# EAGLE board single_board_voice_changer (EAGLE 7.1.0)
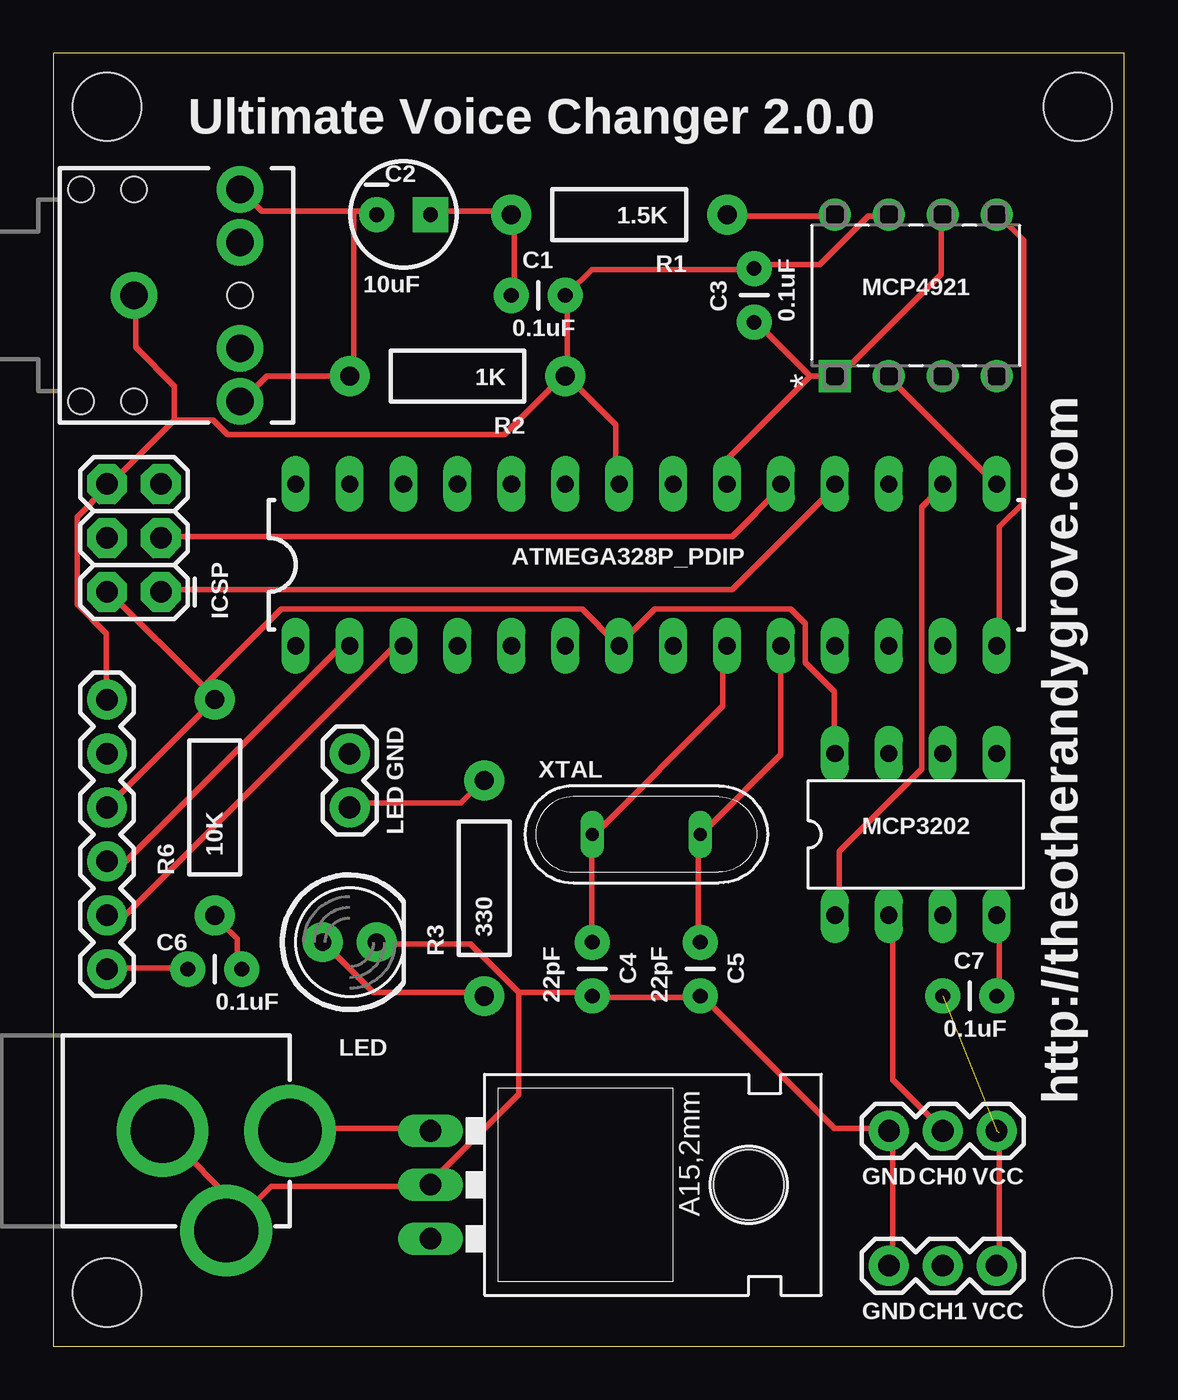
[diagram p0: board, top side]
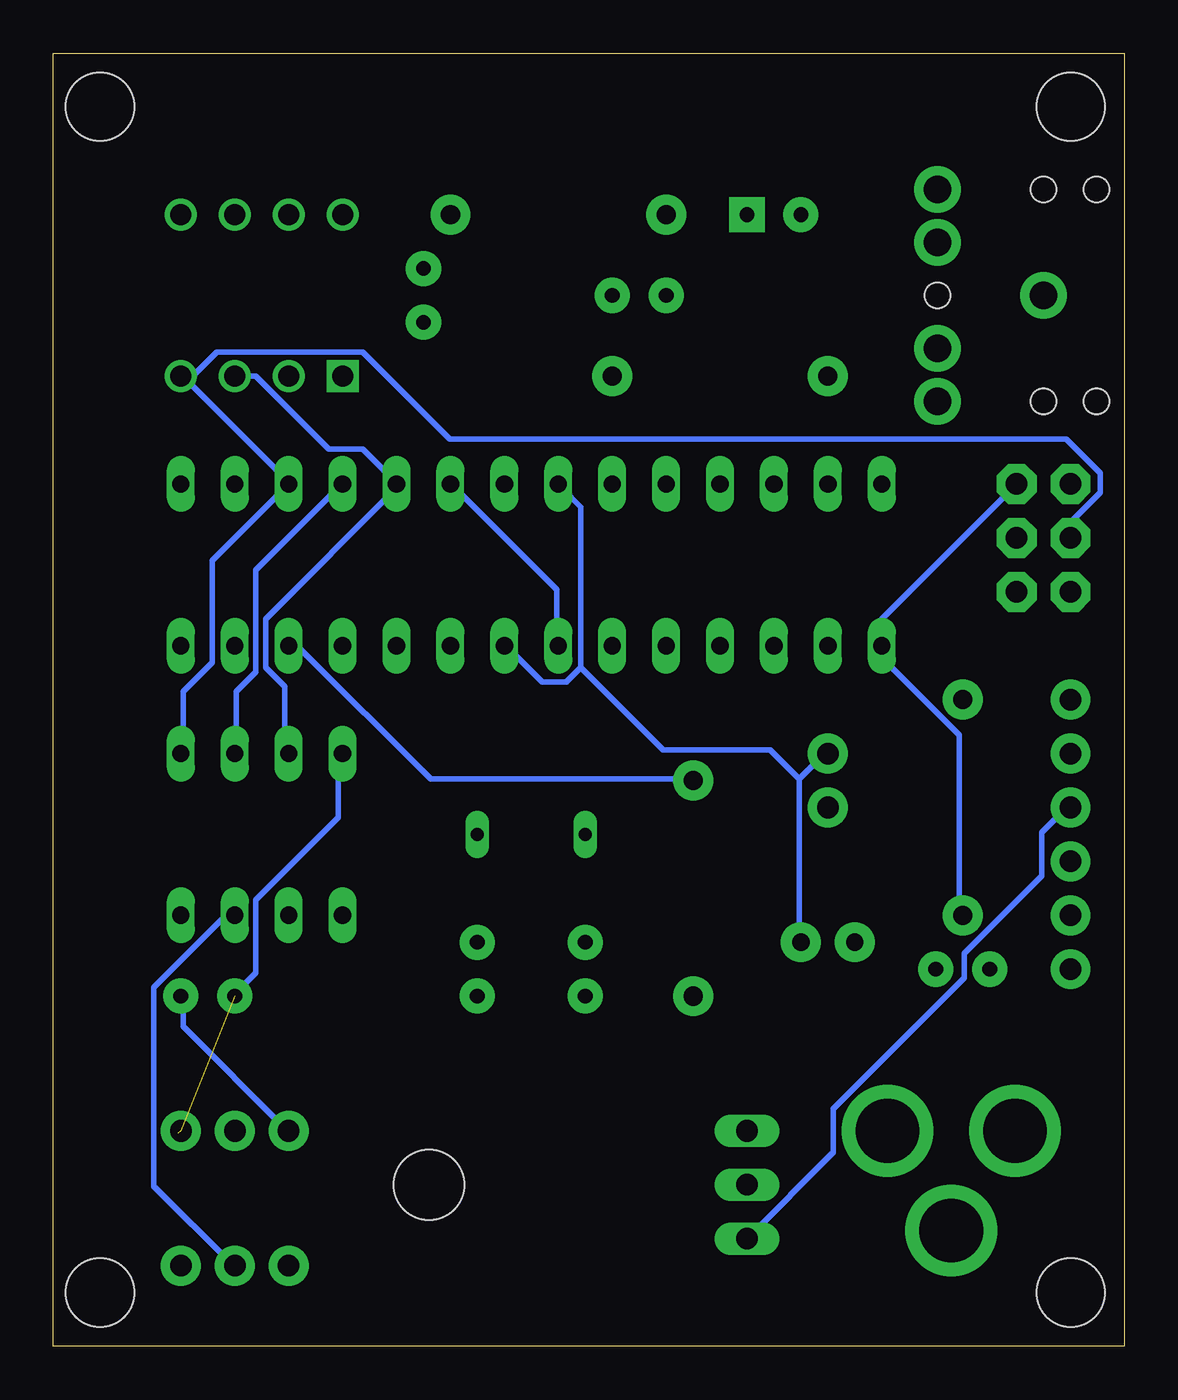
[diagram p1: board, bottom side, seen from below]

Size 50.47 x 60.95 mm. Coordinates in mm from the lower left corner, seen from the top.
Outline: 0,0 50.47,0 50.47,60.95 0,60.95 0,0
Copper layers (1*16): Top 0.035mm / dielectric 1.5mm / Bottom 0.035mm
Design rules "default": minimum track width 10mil, minimum drill 24mil, track to track 8mil, track to pad 8mil, pad to pad 8mil, via to via 8mil, smd to smd 8mil, copper to edge 40mil, drill to drill 8mil, minimum pad ring 10mil, minimum via ring 8mil, stop-mask expansion 4mil, vias tented up to drill 0mil, thermal gap 10mil
Holes 3.2 mm at 2.54,2.54 2.54,58.42 48.26,58.42 48.26,2.54

## Footprints (pad centres in the part's own frame; a part is rotated, then mirrored left to right if it is on the bottom)
AUDIO-JACK = drill 1.3 pad 2.184: RING 5,5; RSH 5,2.5; SLEEVE 0,0; TIP 5,-5; TSH 5,-2.5 | hole 1.2: 0,5; -2.5,5; -2.5,-5; 0,-5; 5,0
CAP-PTH-SMALL = drill 0.7 pad 1.651: 1 0,0; 2 2.54,0
CPOL-RADIAL-10UF-25V = drill 0.7 pad 1.651 square: 1 1.27,0 | drill 0.7 pad 1.651: 2 -1.27,0
1X02 = drill 1.016 pad 1.88: 1 0,0; 2 2.54,0
78XXL = drill 1.016 long: GND 0,-3.81; IN -2.54,-3.81; OUT 2.54,-3.81 | hole 3.302: 0,11.176
DIL8 = drill 0.813 long: 1 -3.81,-3.81; 2 -1.27,-3.81; 3 1.27,-3.81; 4 3.81,-3.81; 5 3.81,3.81; 6 1.27,3.81; 7 -1.27,3.81; 8 -3.81,3.81
2X3 = drill 1.016 pad 1.88 octagon: 1 0,0; 2 0,2.54; 3 2.54,0; 4 2.54,2.54; 5 5.08,0; 6 5.08,2.54
1X03 = drill 1.016 pad 1.88: 1 0,0; 2 2.54,0; 3 5.08,0
POWER_JACK_PTH = drill 2.997 pad 4.318: GND 0,7.7; GNDBREAK 4.7,10.7; PWR 0,13.7
1X06 = drill 1.016 pad 1.88: 1 0,0; 2 2.54,0; 3 5.08,0; 4 7.62,0; 5 10.16,0; 6 12.7,0
LED5MM = drill 0.813 pad 1.88: A -1.27,0; K 1.27,0
AXIAL-0.4 = drill 0.9 pad 1.88: P$1 -5.08,0; P$2 5.08,0
DIL28-3 = drill 0.813 long: 1 -16.51,-3.81; 2 -13.97,-3.81; 3 -11.43,-3.81; 4 -8.89,-3.81; 5 -6.35,-3.81; 6 -3.81,-3.81; 7 -1.27,-3.81; 8 1.27,-3.81; 9 3.81,-3.81; 10 6.35,-3.81; 11 8.89,-3.81; 12 11.43,-3.81; 13 13.97,-3.81; 14 16.51,-3.81; 15 16.51,3.81; 16 13.97,3.81; 17 11.43,3.81; 18 8.89,3.81; 19 6.35,3.81; 20 3.81,3.81; 21 1.27,3.81; 22 -1.27,3.81; 23 -3.81,3.81; 24 -6.35,3.81; 25 -8.89,3.81; 26 -11.43,3.81; 27 -13.97,3.81; 28 -16.51,3.81
DIP254P762X432-8 = drill 0.991 square: 1 -7.62,7.62 | drill 0.991: 2 -7.62,5.08; 3 -7.62,2.54; 4 -7.62,0; 5 0,0; 6 0,2.54; 7 0,5.08; 8 0,7.62
QS = drill 0.61 long: 1 -2.54,0; 2 2.54,0

## Placement (x,y rotation side)
AUDIO_JACK  [AUDIO-JACK]  3.81,49.53 0 top
C1  0.1uF  [CAP-PTH-SMALL]  21.59,49.53 0 top
C2  10uF  [CPOL-RADIAL-10UF-25V]  16.51,53.34 0 top
C3  0.1uF  [CAP-PTH-SMALL]  33.02,48.26 90 top
C4  22pF  [CAP-PTH-SMALL]  25.4,19.05 270 top
C5  22pF  [CAP-PTH-SMALL]  30.48,19.05 270 top
C6  0.1uF  [CAP-PTH-SMALL]  6.35,17.78 0 top
C7  0.1uF  [CAP-PTH-SMALL]  41.91,16.51 0 top
EXT_LED  M02PTH  [1X02]  13.97,27.94 270 top
IC1  [78XXL]  21.59,7.62 270 top
IC2  MCP3202P  [DIL8]  40.64,24.13 0 top
ICSP  AVR_SPI_PRG_6PTH  [2X3]  5.08,35.56 90 top
INPUT1  [1X03]  39.37,10.16 0 top
INPUT2  [1X03]  39.37,3.81 0 top
JP1  POWER_JACKPTH  [POWER_JACK_PTH]  -2.54,10.16 270 top
JP2  [1X06]  2.54,17.78 90 top
LED  [LED5MM]  13.97,19.05 0 top
R1  1.5K  [AXIAL-0.4]  26.67,53.34 180 top
R2  1K  [AXIAL-0.4]  19.05,45.72 180 top
R3  330  [AXIAL-0.4]  20.32,21.59 90 top
R6  10K  [AXIAL-0.4]  7.62,25.4 90 top
U1  ATMEGA328P_PDIP  [DIL28-3]  27.94,36.83 0 top
U$1  MCP4921-E/P  [DIP254P762X432-8]  44.45,53.34 90 top
XTAL  [QS]  27.94,24.13 0 top

## Library data of the parts
AUDIO_JACK EXT_LED ICSP INPUT1 INPUT2 = SparkFun-Connectors
C1-C5 C7 R1-R3 R6 = SparkFun-Passives
C6 = SparkFun-Capacitors
IC1 = SparkFun-PowerIC
IC2 = microchip; MF: MICROCHIP; MPN: MCP3202-CI/P; OC_FARNELL: 1196794; OC_NEWARK: 72K7287
JP1 = SparkFun-Connectors; PROD_ID: CONN-08197
JP2 = SparkFun-Connectors; PROD_ID: CONN-08437
LED = SparkFun-LED
U1 = SparkFun-DigitalIC
U$1 = Microchip_By_element14_Batch_1; MPN: MCP4921-E/P; OC_FARNELL: 1332112; OC_NEWARK: 08J8743; PACKAGE: DIP-8; SUPPLIER: Microchip
XTAL = special

## Nets
ADC_CH0: IC2.2 INPUT1.2
ADC_CH1: IC2.3 INPUT2.2
CTS: JP2.5
DTR: C6.1 JP2.1
GND: AUDIO_JACK.SLEEVE C1.2 C3.2 C4.2 C5.2 C7.2 EXT_LED.1 IC1.GND IC2.4 ICSP.6 INPUT1.1 INPUT2.1 JP1.GND JP1.GNDBREAK JP2.6 LED.K R2.P$1 U1.8 U1.22 U$1.7
LDAC: U1.14 U$1.5
LED: EXT_LED.2 R3.P$2 U1.12
MISO: IC2.6 ICSP.1 U1.18
MOSI: IC2.5 ICSP.4 U1.17 U$1.4
N$1: R1.P$1 U$1.8
N$2: C1.1 C2.1 R1.P$2
N$3: LED.A R3.P$1
N$4: IC1.IN JP1.PWR
N$5: C4.1 U1.9 XTAL.1
N$8: C5.1 U1.10 XTAL.2
N$10: AUDIO_JACK.RING AUDIO_JACK.TIP C2.2 R2.P$2
RESET: C6.2 ICSP.5 R6.P$1 U1.1
RX: JP2.3 U1.2
SCK: IC2.7 ICSP.3 U1.19 U$1.3
SS_ADC: IC2.1 U1.16
SS_DAC: U1.15 U$1.2
TX: JP2.2 U1.3
VCC: C3.1 C7.1 IC1.OUT IC2.8 ICSP.2 INPUT1.3 INPUT2.3 JP2.4 R6.P$2 U1.7 U1.20 U$1.1 U$1.6

## Tracks (layer width: path | path; a pad name or v marks a point on that pad's centre or on a via)
ADC_CH0
  Top 0.254: IC2.2 39.55,20.12 39.55,12.57 41.83,10.29 INPUT1.2
ADC_CH1
  Bottom 0.254: IC2.3 42.06,20.12 42.52,20.12 45.72,16.92 45.72,7.54 42.06,3.89 INPUT2.2
DTR
  Top 0.254: C6.1 6.17,17.83 2.74,17.83 JP2.1
GND
  Top 0.254: JP2.6 2.52,30.63 2.52,33.6 1.14,34.98 1.14,39.09 2.52,40.46 ICSP.6 2.74,40.69 5.71,43.66 | 5.71,43.66 5.71,45.26 3.89,47.09 3.89,49.38 AUDIO_JACK.SLEEVE | U$1.7 39.32,53.26 38.41,53.26 36.12,50.98 33.15,50.98 C3.2 32.92,50.75 25.38,50.75 24.23,49.61 C1.2 24.23,49.38 24.23,45.72 | 24.23,45.72 26.52,43.43 26.52,40.69 U1.22 | 24.23,45.72 R2.P$1 24,45.72 21.26,42.98 8.23,42.98 7.54,43.66 5.71,43.66 | 9.14,6.4 8.23,5.49 JP1.GNDBREAK 9.14,6.4 | 9.14,6.4 10.29,7.54 17.6,7.54 IC1.GND 17.83,7.77 21.95,11.89 21.95,16.69 | 9.14,6.4 8.91,6.4 5.26,10.06 JP1.GND | IC2.4 44.58,20.12 44.58,16.69 C7.2 | INPUT2.1 39.55,3.89 39.55,10.06 INPUT1.1 39.32,10.29 36.8,10.29 30.63,16.46 C5.2 30.4,16.46 25.6,16.46 C4.2 25.38,16.69 21.95,16.69 | 21.95,16.69 19.66,18.97 15.32,18.97 LED.K
  Bottom 0.254: 25.6,32 26.29,31.32 27.43,31.32 29.03,32.92 U1.8 | 25.6,32 25.6,39.55 26.52,40.46 U1.22 | C7.2 44.35,16.46 44.35,15.09 39.55,10.29 INPUT1.1 | 15.32,26.75 15.32,19.2 LED.K | 15.32,26.75 14.17,27.89 EXT_LED.1 | 25.6,32 21.72,28.12 16.69,28.12 15.32,26.75
LDAC
  Top 0.254: U1.14 44.58,33.15 44.58,38.63 45.72,39.78 45.72,52.12 44.58,53.26 U$1.5
LED
  Top 0.254: EXT_LED.2 14.17,25.6 19.2,25.6 20.12,26.52 R3.P$2
  Bottom 0.254: U1.12 39.32,32.92 38.86,32.92 32.69,26.75 20.34,26.75 R3.P$2
MISO
  Top 0.254: ICSP.1 5.26,35.66 32,35.66 36.8,40.46 U1.18
  Bottom 0.254: IC2.6 41.83,28.12 41.83,30.86 40.92,31.77 40.92,36.58 37.03,40.46 U1.18
MOSI
  Bottom 0.254: IC2.5 44.35,28.12 44.35,30.86 42.98,32.23 42.98,37.03 U1.17 39.32,40.69 44.12,45.49 | 44.12,45.49 44.35,45.72 U$1.4 44.12,45.49 | 44.12,45.49 42.75,46.86 35.89,46.86 31.77,42.75 2.74,42.75 1.14,41.15 1.14,40.23 2.52,38.86 2.52,38.18 ICSP.4
N$1
  Top 0.254: U$1.8 36.8,53.26 31.77,53.26 R1.P$1
N$2
  Top 0.254: C2.1 17.83,53.49 21.49,53.49 R1.P$2 21.72,53.26 21.72,49.61 C1.1
N$3
  Top 0.254: R3.P$1 20.12,16.69 15.09,16.69 12.8,18.97 LED.A
N$4
  Top 0.254: IC1.IN 17.6,10.29 11.2,10.29 JP1.PWR
N$5
  Top 0.254: C4.1 25.38,19.2 25.38,24 XTAL.1 25.6,24.23 31.55,30.18 31.55,32.92 U1.9
N$8
  Top 0.254: C5.1 30.4,19.2 30.4,24 XTAL.2 30.63,24.23 34.29,27.89 U1.10
N$10
  Top 0.254: AUDIO_JACK.TIP 8.91,44.58 10.06,45.72 R2.P$2 14.17,45.72 14.17,53.49 | 14.17,53.49 9.83,53.49 8.91,54.41 AUDIO_JACK.RING | 14.17,53.49 15.09,53.49 C2.2
RESET
  Top 0.254: C6.2 8.69,17.83 8.69,19.2 7.77,20.12 R6.P$1
  Bottom 0.254: ICSP.5 11.43,34.29 U1.1 11.43,32.46 7.77,28.8 7.77,20.34 R6.P$1
RX
  Top 0.254: JP2.3 3.43,22.86 13.49,32.92 13.95,32.92 U1.2
SCK
  Top 0.254: ICSP.3 5.26,38.18 32,38.18 34.29,40.46 U1.19
  Bottom 0.254: IC2.7 39.55,28.12 39.55,31.09 40.46,32 40.46,34.29 34.29,40.46 U1.19 34.29,40.69 35.89,42.29 37.49,42.29 40.92,45.72 U$1.3
SS_ADC
  Top 0.254: IC2.1 37.03,20.34 37.03,23.32 40.92,27.2 40.92,39.55 41.83,40.46 U1.16
SS_DAC
  Top 0.254: U1.15 44.35,40.69 39.32,45.72 U$1.2
TX
  Top 0.254: U1.3 16.46,32.92 16,32.92 3.43,20.34 2.74,20.34 JP2.2
VCC  (2 unrouted)
  Top 0.254: 7.09,31.09 7.54,30.63 R6.P$2 | 7.09,31.09 2.74,35.43 ICSP.2 | JP2.4 R6.P$2 | 35.66,45.72 U$1.1 37.03,45.72 41.83,50.52 41.83,53.26 U$1.6 | 35.66,45.72 33.15,48.23 C3.1 | 35.66,45.72 31.77,41.83 31.77,40.69 U1.20 | IC2.8 36.8,28.12 36.8,30.86 35.43,32.23 35.43,34.06 34.75,34.75 28.35,34.75 26.75,33.15 U1.7 26.52,33.15 24.92,34.75 10.74,34.75 7.09,31.09 | 7.09,31.09 R6.P$2 | 44.58,10.06 44.58,3.89 INPUT2.3
  Bottom 0.254: IC1.OUT 13.72,9.14 13.72,11.2 7.54,17.37 7.54,18.52 3.89,22.17 3.89,24.23 2.74,25.38 JP2.4 | IC2.8 37.03,27.89 37.03,24.92 40.92,21.03 40.92,17.6 41.83,16.69 C7.1 | U1.7 26.75,33.15 26.75,35.66 31.55,40.46 U1.20

## Text on the board
tNames: Ultimate Voice Changer 2.0.0 | MCP4921 | GND | LED | MCP3202 | http://theotherandygrove.com | GND | CH0 | VCC | GND | CH1 | VCC